# Altium PCB 2019_VL53_Fixator.PcbDoc
Units mil, origin at the board's own origin, x right, y up, seen from the top; angles counter-clockwise.
Board outline 1185.03 x 880.03 mil, 4 copper layers (1-TOP, 2-SIGNAL, 3-GND, 4-BOT), stack 68 mil thick; 8 components, 5 nets, 19 pads, 47 vias.
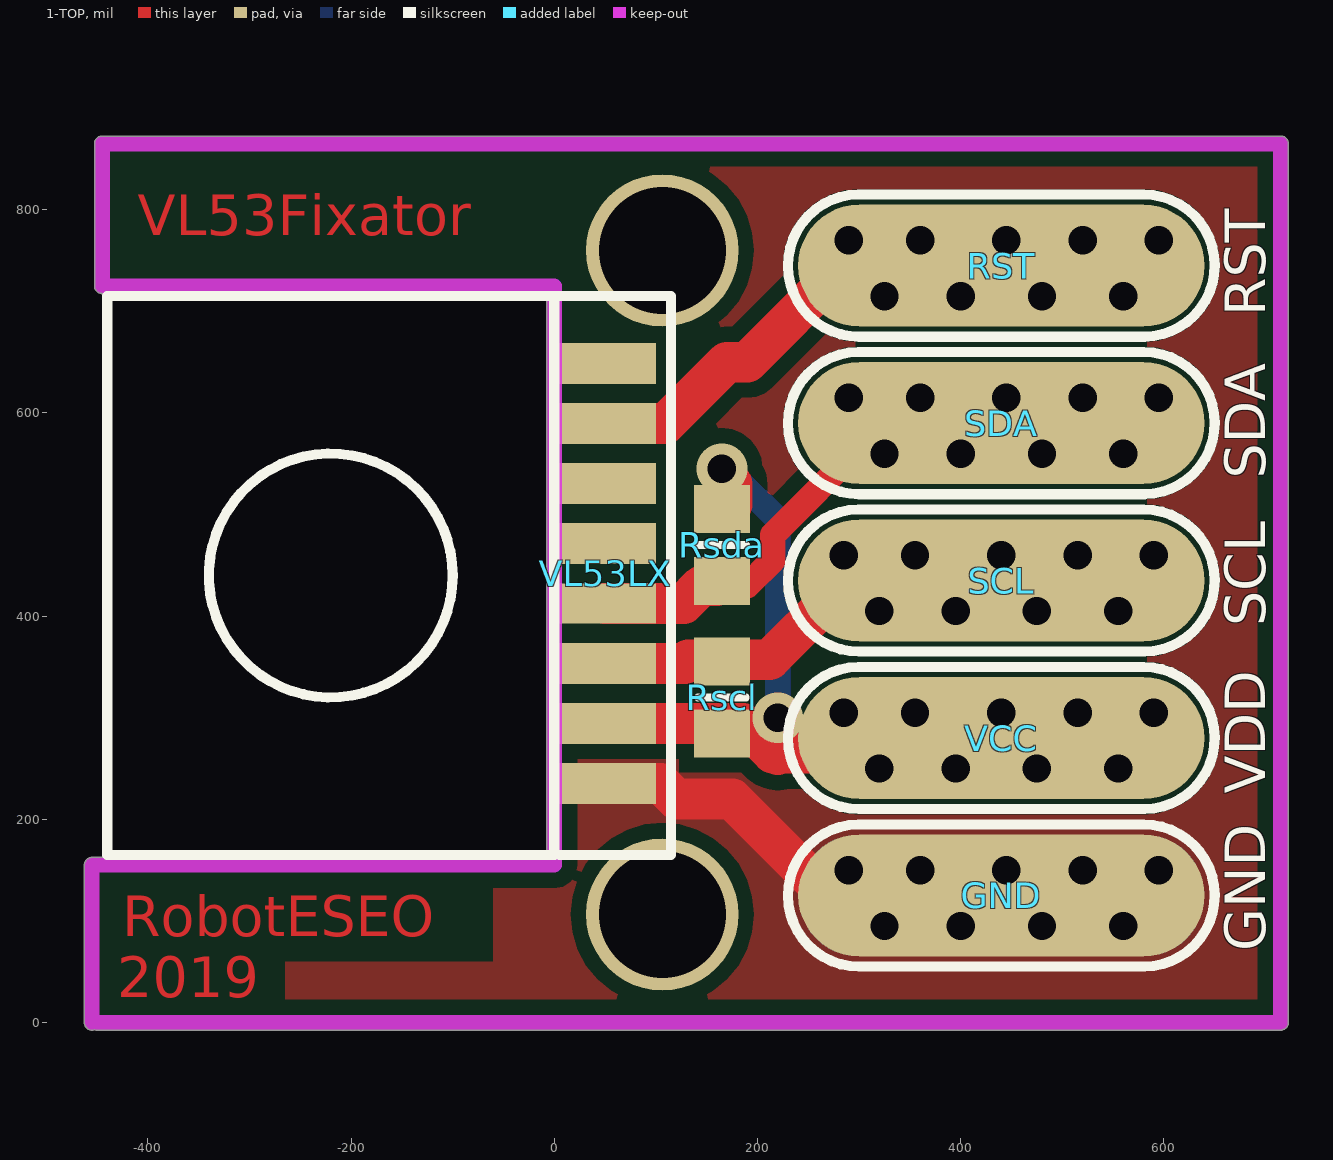
[diagram p0: 1-TOP view]
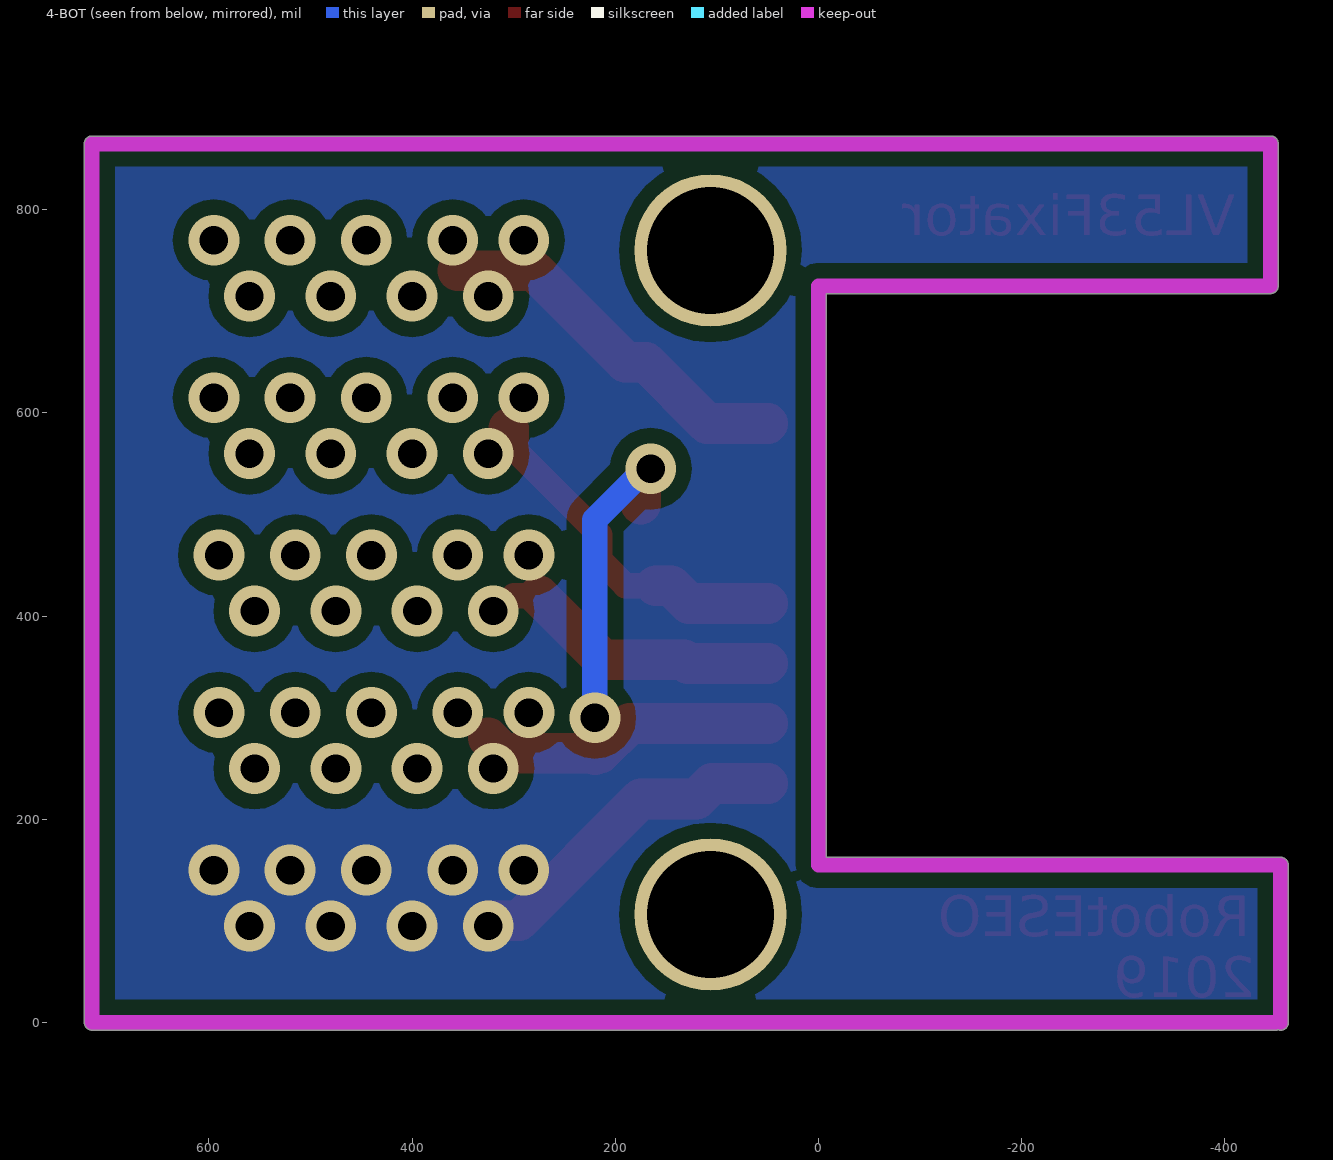
[diagram p1: 4-BOT view, seen from below]
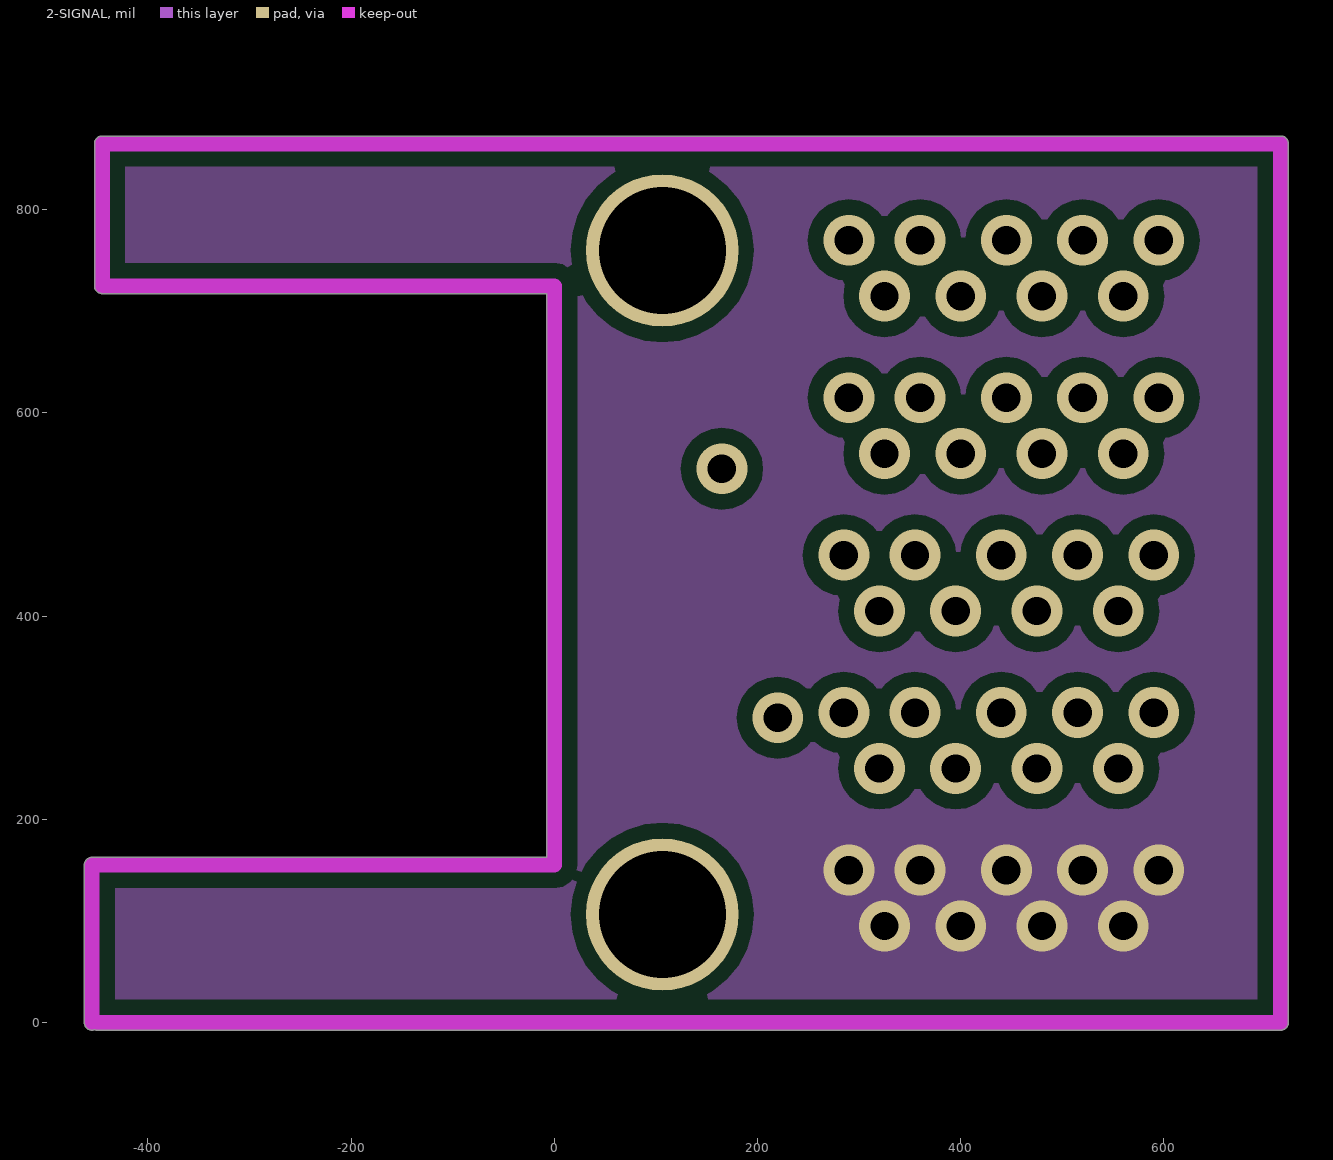
[diagram p2: 2-SIGNAL]
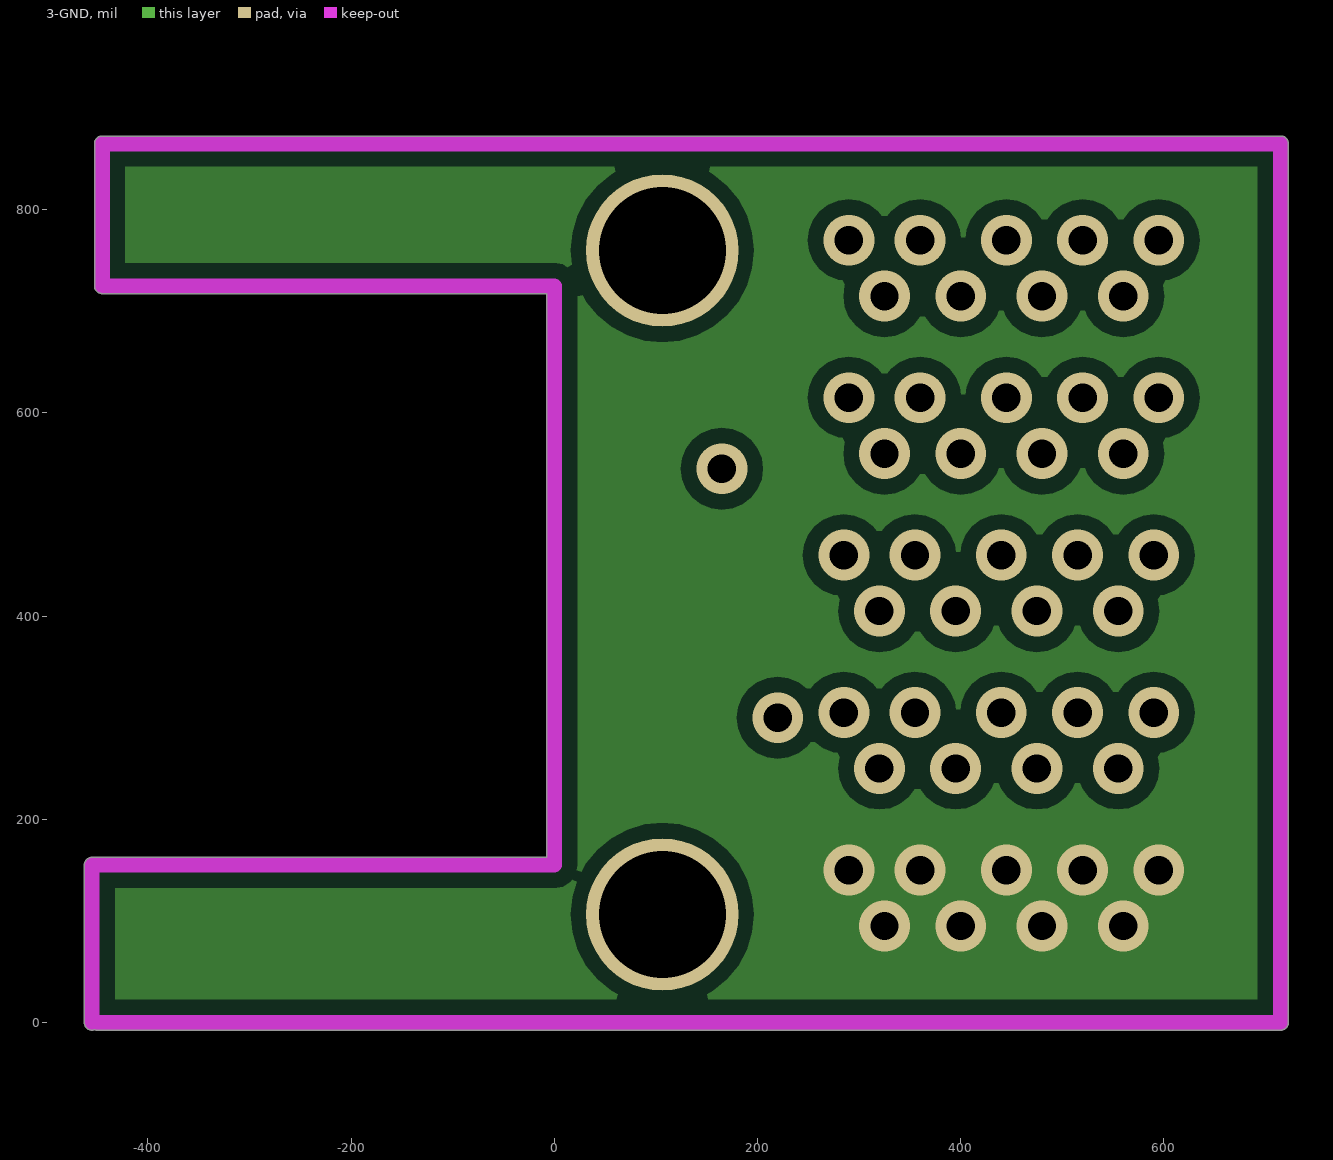
[diagram p3: 3-GND]
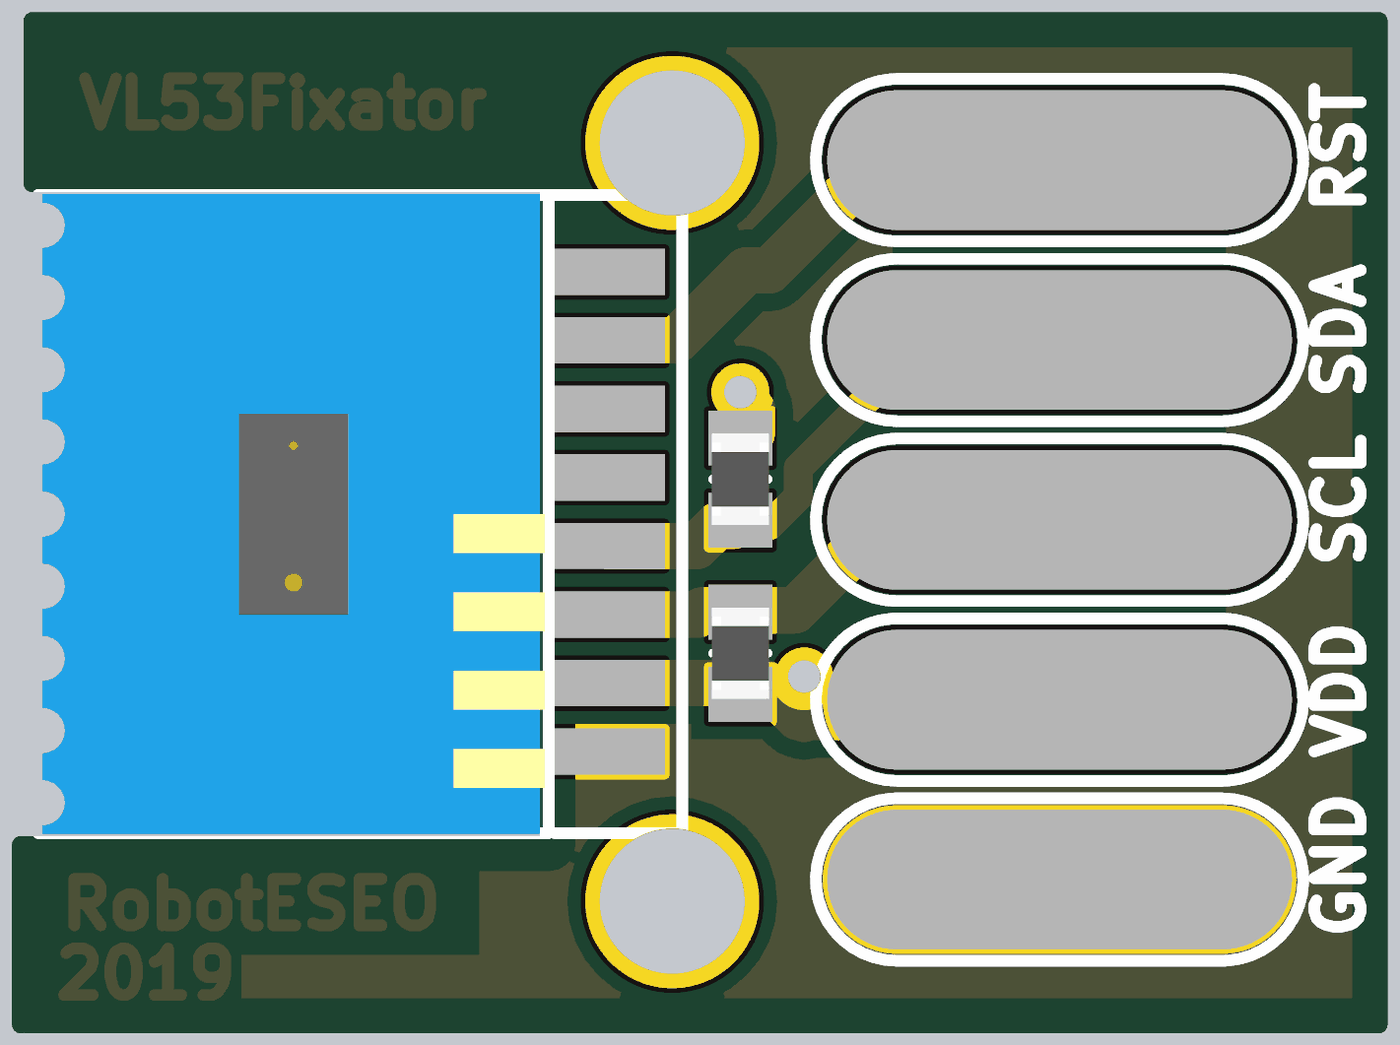
[diagram p4: 3D render of the assembled board from above, using the file's embedded part models]

## Layer stack, top to bottom
Top Solder: solder mask 0.4, Solder Resist, Dk 3.5
1-TOP: signal copper 1.4
Dielectric1: core 20.8, FR-4, Dk 4.8
2-SIGNAL: signal copper 1.4
Dielectric2: prepreg 20.8, FR-4, Dk 4.8
3-GND: signal copper 1.4
Dielectric3: core 20.8, FR-4, Dk 4.8
4-BOT: signal copper 1.4
Bottom Solder: solder mask 0.4, Solder Resist, Dk 3.5

## Board outline
-462.52,0 ccw(c-455,0) -452.5,-7.09 ccw(c-450,0) -450,-7.52 715,-7.52 ccw(c715,0) 722.51,0 722.51,865 ccw(c715,865) 715,872.51 -445,872.51 ccw(c-445,865) -452.52,865 -452.52,725 ccw(c-445,725) -445,717.49 -7.52,717.49 -7.52,162.52 -455,162.52 ccw(c-455,155) -462.52,155

## Design rules (kind name [scope] priority, off if disabled: settings)
Clearance Clearance_4 [InNamedPolygon('GND_TOP') Or  InNamedPolygon('3-GND') Or  InNamedPolygon('2-GND') Or  InNamedPolygon('4-GND')] p1: gap=15
Clearance Clearance_3 [InNamedPolygon('4-GND') Or  InNamedPolygon('GND_TOP') Or  InNamedPolygon('2-GND') Or  InNamedPolygon('3-GND')] p2: gap=10
Clearance Clearance_2 [InNamedPolygon('4-GND') Or  InNamedPolygon('2-GND') Or  InNamedPolygon('3-GND') Or  InNamedPolygon('1-GND') Or  InNamedPolygon('2-GND24')] p3: gap=10
Clearance Clearance_1 [InNamedPolygon('2-GND') Or  InNamedPolygon('3-GND') Or  InNamedPolygon('1-GND') Or  InNamedPolygon('4-GND')] p4: gap=10
Clearance [All] p5: gap=7
FabricationTestpoint [(IsPad And (OnTopLayer Or OnBottomLayer))] p1: side=3 testpointundercomponent=TRUE minsize=40 maxsize=100 preferedsize=60 minholesize=0 maxholesize=40 preferedholesize=32 testpointgrid=1 allowsidetop=TRUE allowsidebottom=TRUE usegrid=TRUE gridtolerance=0.01
HoleSize [All] p1: absolutevalues=TRUE maxlimit=200 minlimit=1 maxpercent=80.000 minpercent=20.000
PlaneConnect [All] p1: planeconnectstyle=Direct reliefexpansion=20 reliefentries=4 reliefconductorwidth=10 reliefairgap=10
PolygonConnect [All] p1: connectstyle=Direct reliefconductorwidth=10 reliefentries=4 polygonreliefangle="90 Angle" airgapwidth=10
RoomDefinition 2019_VL53_Fixator [InComponentClass('2019_VL53_Fixator')] p1: confinementstyle=ConfineIn formatcopy=TRUE lockcomponents=FALSE outline 3234.92,-2391.14 2704.92,-2391.14 2704.92,-1841.14 3234.92,-1841.14
RoutingVias [All] p1: holewidth=28 width=50 viastyle="Through Hole" minholewidth=28 minwidth=50 maxholewidth=28 maxwidth=50
SilkToSolderMaskClearance SilkscreenOverComponentPads [IsPad] p1: minsilkscreentomaskgap=10 clearancetoexposedcopper=TRUE
SolderMaskExpansion [All] p1: expansion=4
Width [All] p1: maxlimit=200 minlimit=10 preferedwidth=15
25 further rules are at their usual default settings.

## Components (designator, comment, footprint, x,y, rotation, side; value= is the part's Value field where it differs from the comment)
GND "Pad_CMS" PAD_CMS_10x3 440,125 r180 top
Rscl "10k" R0805_N 165,320 r90 top
Rsda "10k" R0805_N 165,470 r270 top
RST "Pad_CMS" PAD_CMS_10x3 440,745 r0 top
SCL "Pad_CMS" PAD_CMS_10x3 440,435 r0 top
SDA "Pad_CMS" PAD_CMS_10x3 440,590 r0 top
VCC "Pad_CMS" PAD_CMS_10x3 440,280 r180 top
VL53LX "VL53LX" VL53LX -220,440 r0 top

## Footprints (in the part's own frame and the unit in brackets; to place one, negate y for a bottom-side part, rotate by r counter-clockwise, add the part's x,y. Pads: shape width x height; smd on the part's side, far side on the other; paste and mask are expansions set on the pad)
PAD_CMS_10x3 [mil] "Pad pour souder un fil"
  oval 400x120 smd paste+0.2: 1(0,0)
  silkscreen extent -210,-70 210,70, body extent -135,-30 135,30, height 10
R0805_N [mm] "Chip Resistor, Body 2.0x1.3mm, IPC Medium Density"
  rect 1.2x1.4 smd: 1(-0.9,0) 2(0.9,0)
  silkscreen extent 0,-0.6 0,0.6, body extent -1.08,-0.7 1.08,0.7, height 0.65
VL53LX [mil]
  rect 100x40 smd: 1(270,-204.72) 2(270,-145.67) 3(270,-86.61) 5(270,31.5) 6(270,90.55) 7(270,149.61) 8(270,208.66)
  rect 100x39.37 smd: 4(270,-27.56)
  silkscreen extent -220,-275 335,275, body extent -217,-276 217,276, height 37

## Part data
GND RST SCL SDA VCC: "Pad pour souder un fil"
Rscl Rsda: library part Resistor, "Resistor"

## Free pads (board coordinates)
  round 150 hole 125: 9(106.3,106.3) 9(106.3,759.84)

## Via types
v1: diameter 50, hole 28, 1-TOP to 4-BOT, 47 vias

## Nets (pads, with @x,y where several pads share a name; then routed paths per layer and width w, separated by ;. In a path a pad name is that pad's centre, name@x,y a point inside that pad or via, vN(x,y) a via of type N, cw(c..) or ccw(c..) an arc to the next point about the centre after c; other vN are vias at no path point)
GND: GND.1 VL53LX.1 | length 331
  1-TOP w40: VL53LX.1 104.72,235.28 120,220 175,220 295,100 GND.1@325,100
  other v1: 325,95 400,95 480,95 560,95 290,150 360,150 445,150 520,150 595,150
NetRscl_2: Rscl.2 SCL.1 VL53LX.3 | length 277.6
  1-TOP w25: SCL.1@275,420 SCL.1@300,420
  1-TOP w40: VL53LX.3 128.39,353.39 132,357 212,357 SCL.1@275,420
  other v1: 320,405 395,405 475,405 555,405 285,460 355,460 440,460 515,460 590,460
NetRsda_2: Rsda.2 SDA.1 VL53LX.4 | length 349.9
  1-TOP w25: Rsda.2@160,430 190,430 215,455 215,480 SDA.1@305,570
  1-TOP w40: VL53LX.4 127.44,412.44 145,430 Rsda.2@160,430 ; SDA.1@305,570 SDA.1@305,585
  other v1: 325,560 400,560 480,560 560,560 290,615 360,615 445,615 520,615 595,615
NetRST_1: RST.1 VL53LX.7 | length 367.3
  1-TOP w40: VL53LX.7 109.61,589.61 170,650 190,650 280,740 RST.1@355,740
  other v1: 325,715 400,715 480,715 560,715 290,770 360,770 445,770 520,770 595,770
VCC: Rscl.1 Rsda.1 VCC.1 VL53LX.2 | length 601.5
  1-TOP w40: VL53LX.2 185.67,294.33 215,265 220,265 ; Rsda.1@175,510 v1@175,530 ; 220,263.46 220,265 ; v1@220,305 220,265 ; VCC.1@325,280 310,265 220,265
  4-BOT w25: v1@180,535 220,495 v1@220,305
  other v1: 320,250 395,250 475,250 555,250 220,300 285,305 355,305 440,305 515,305 590,305 165,545
pads on no net: VL53LX.5 VL53LX.6 VL53LX.8

## Polygon pours and split planes (outlines as drawn)
GND on 4-BOT "4-GND" (solid, pour order 8): -452.94,865 715,865 715,-17.5 -452.94,-17.5
GND on 3-GND "3-GND" (solid, pour order 9): -455,865 710,865 710,-15 -455,-15
GND on 2-SIGNAL "2-GND" (solid, pour order 10): -455,865 715,865 715,5 -455,5
GND on 1-TOP "GND_TOP" (solid, pour order 11): -452.94,865 715,865 715,5 -452.94,5

## Keep-outs
Keep-Out Layer:
  lines w15: -455,0 -455,155 0,155 0,725 -445,725 -445,865 715,865 715,0 -450,0

## Other copper
1-TOP:
  pour cut-out: -460,715 0,715 0,170 -460,170
  text "VL53Fixator" at -410,775 h40
  text "RobotESEO" at -425,85 h40
  text "2019" at -430,25 h40
2-SIGNAL:
  pour cut-out: -460,715 0,715 0,170 -460,170
3-GND:
  pour cut-out: -460,715 0,715 0,170 -460,170
4-BOT:
  pour cut-out: -460,715 0,715 0,170 -460,170

## Text inside footprints (layer, text, board x,y; h text height)
VL53LX: Top Overlay "RST" at 700,695 h40 r90; Top Overlay "SDA" at 700,535 h40 r90; Top Overlay "SCL" at 700,390 h40 r90; Top Overlay "VDD" at 700,225 h40 r90; Top Overlay "GND" at 700,70 h40 r90